# Altium PCB STM32.PcbDoc
Units mm, origin at the board's own origin, x right, y up, seen from the top; angles counter-clockwise.
Board outline 60 x 60 mm, 4 copper layers (Top Layer, Int1 (GND), Int2 (PWR), Bottom Layer), stack 1.24 mm thick; 38 components, 25 nets, 180 pads, 58 vias.
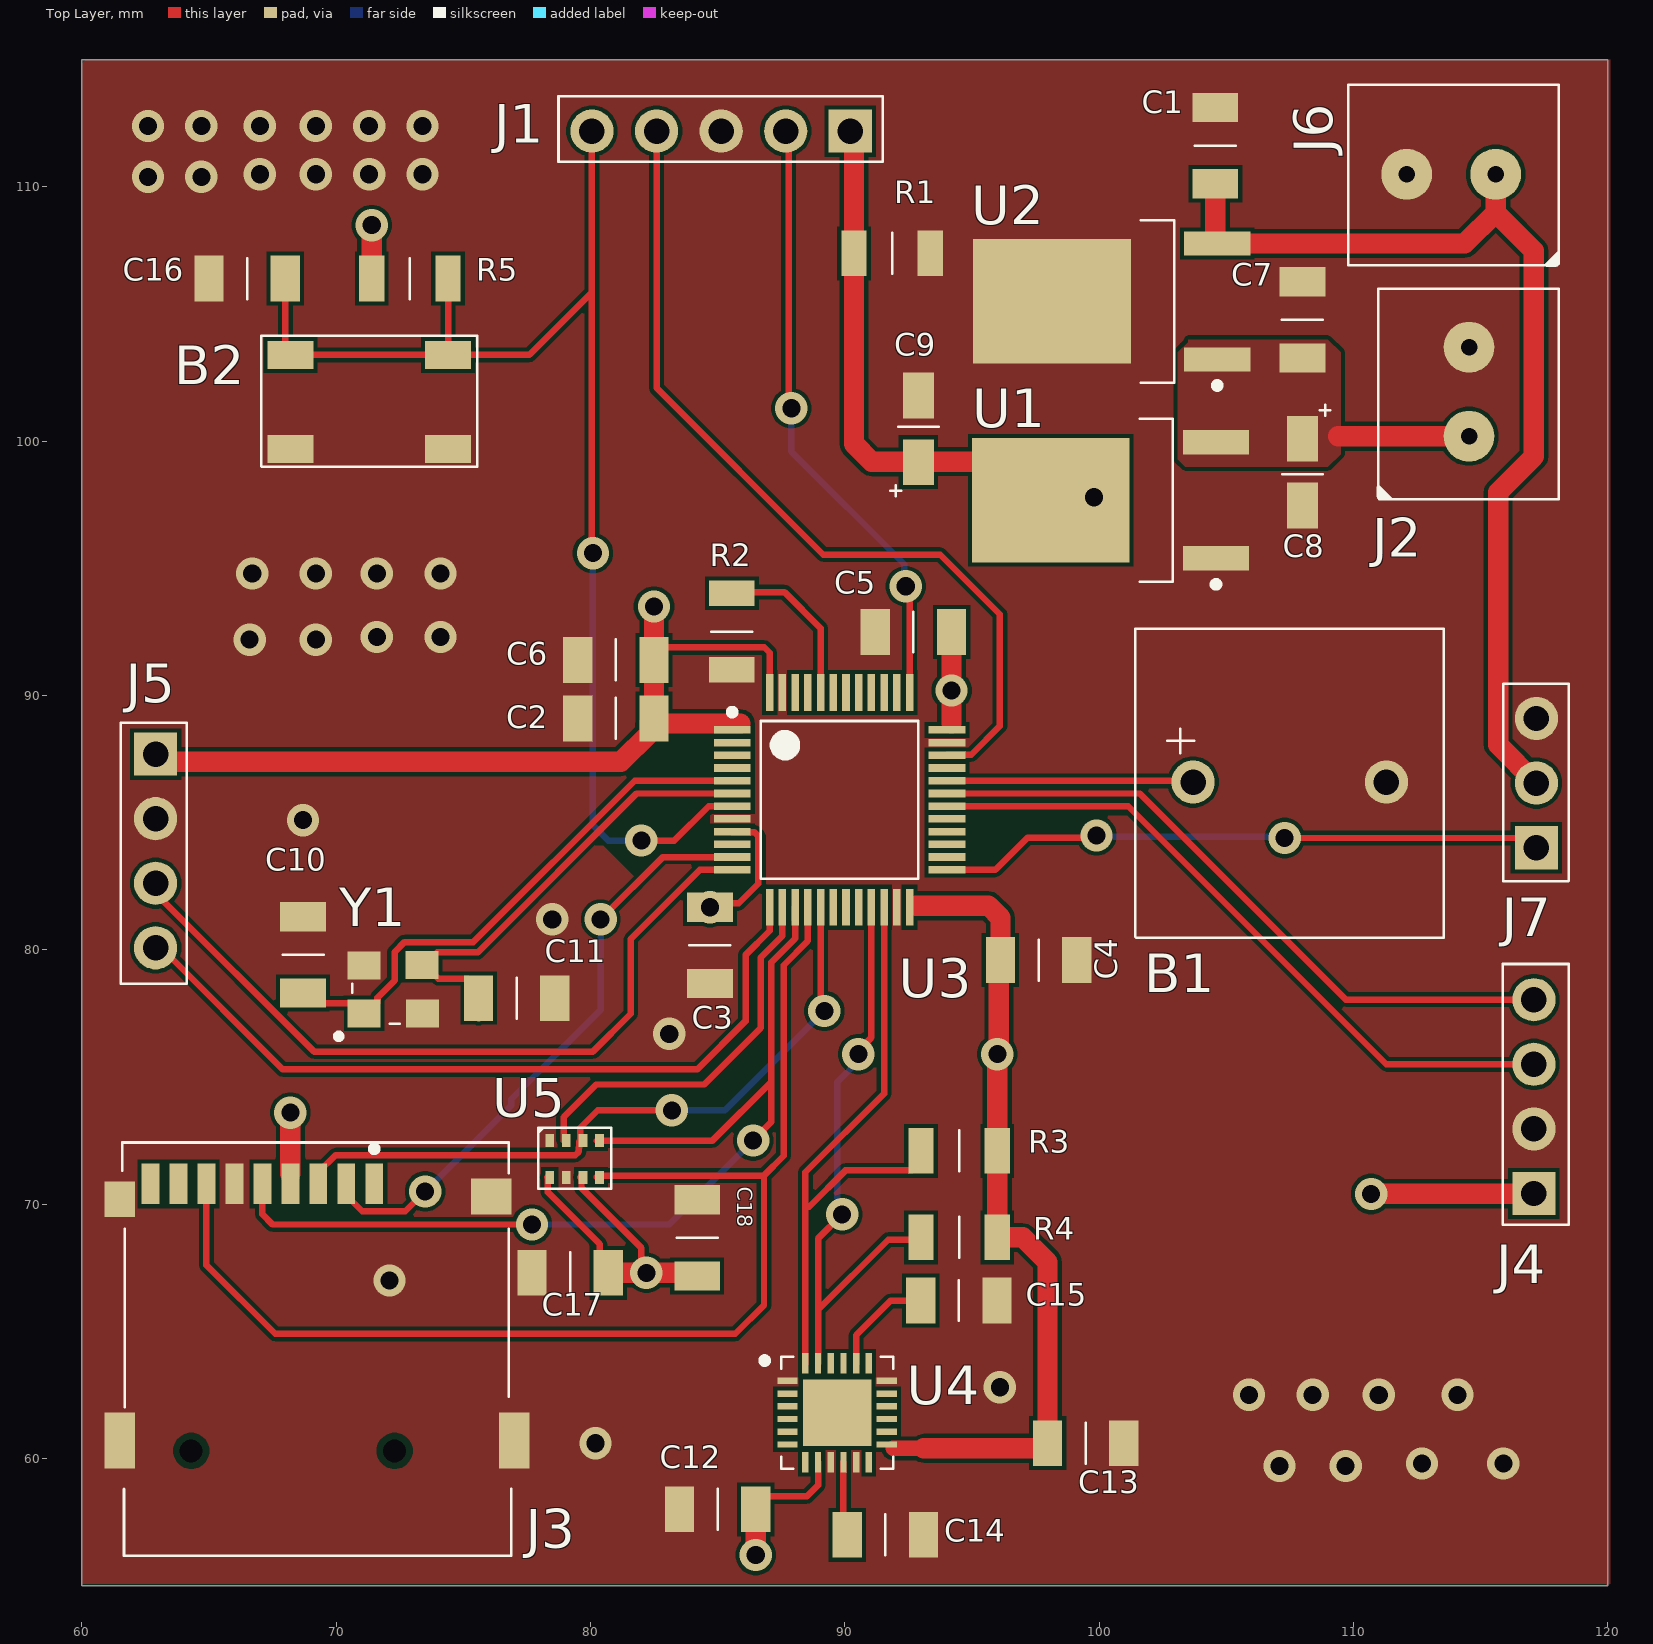
[diagram p0: Top Layer view]
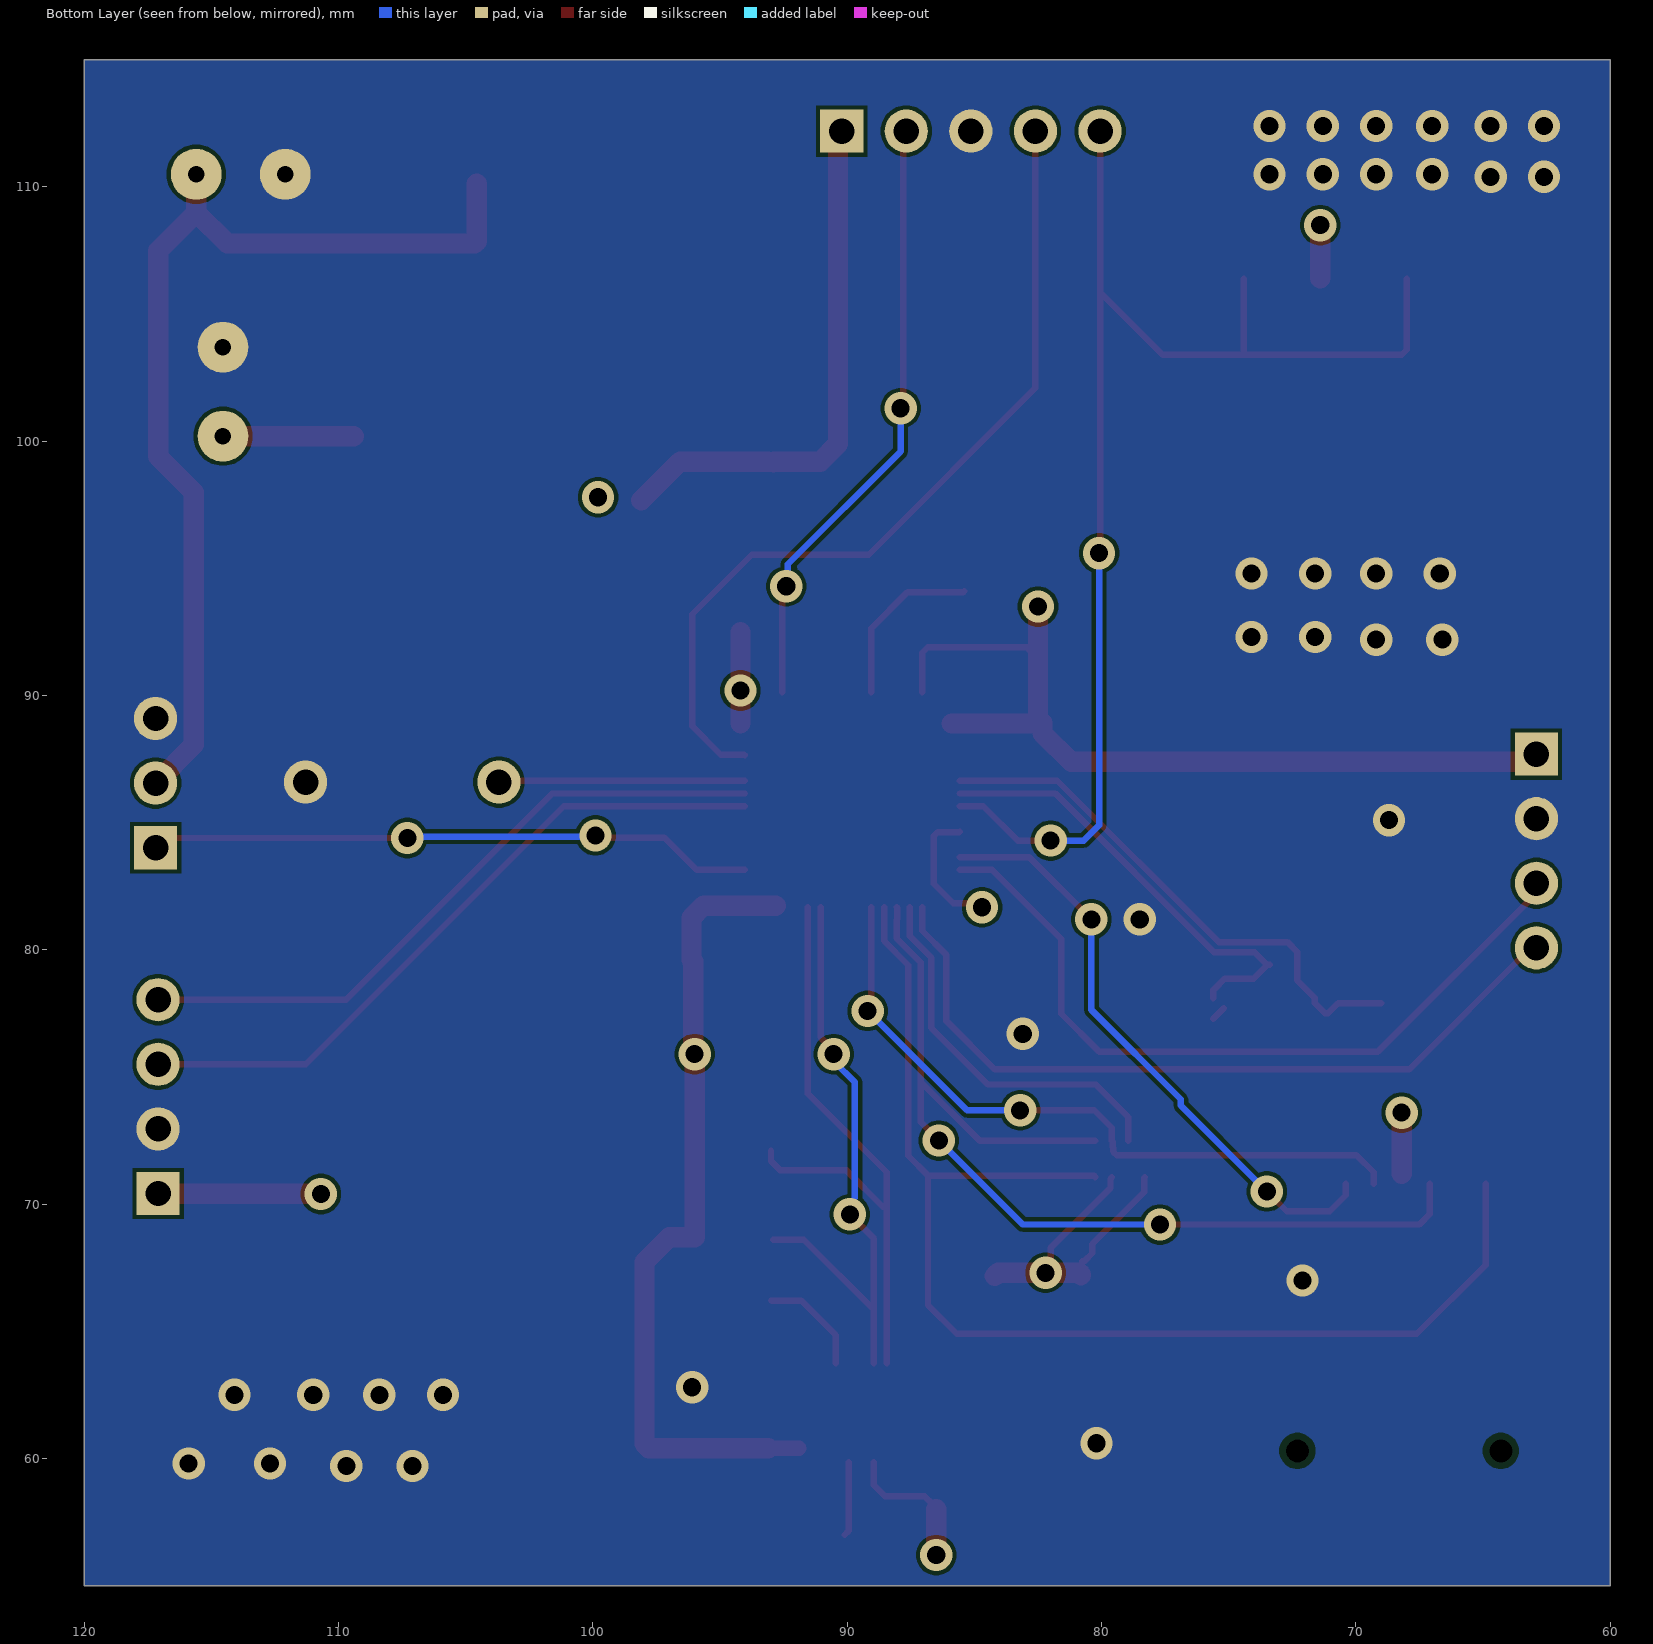
[diagram p1: Bottom Layer view, seen from below]
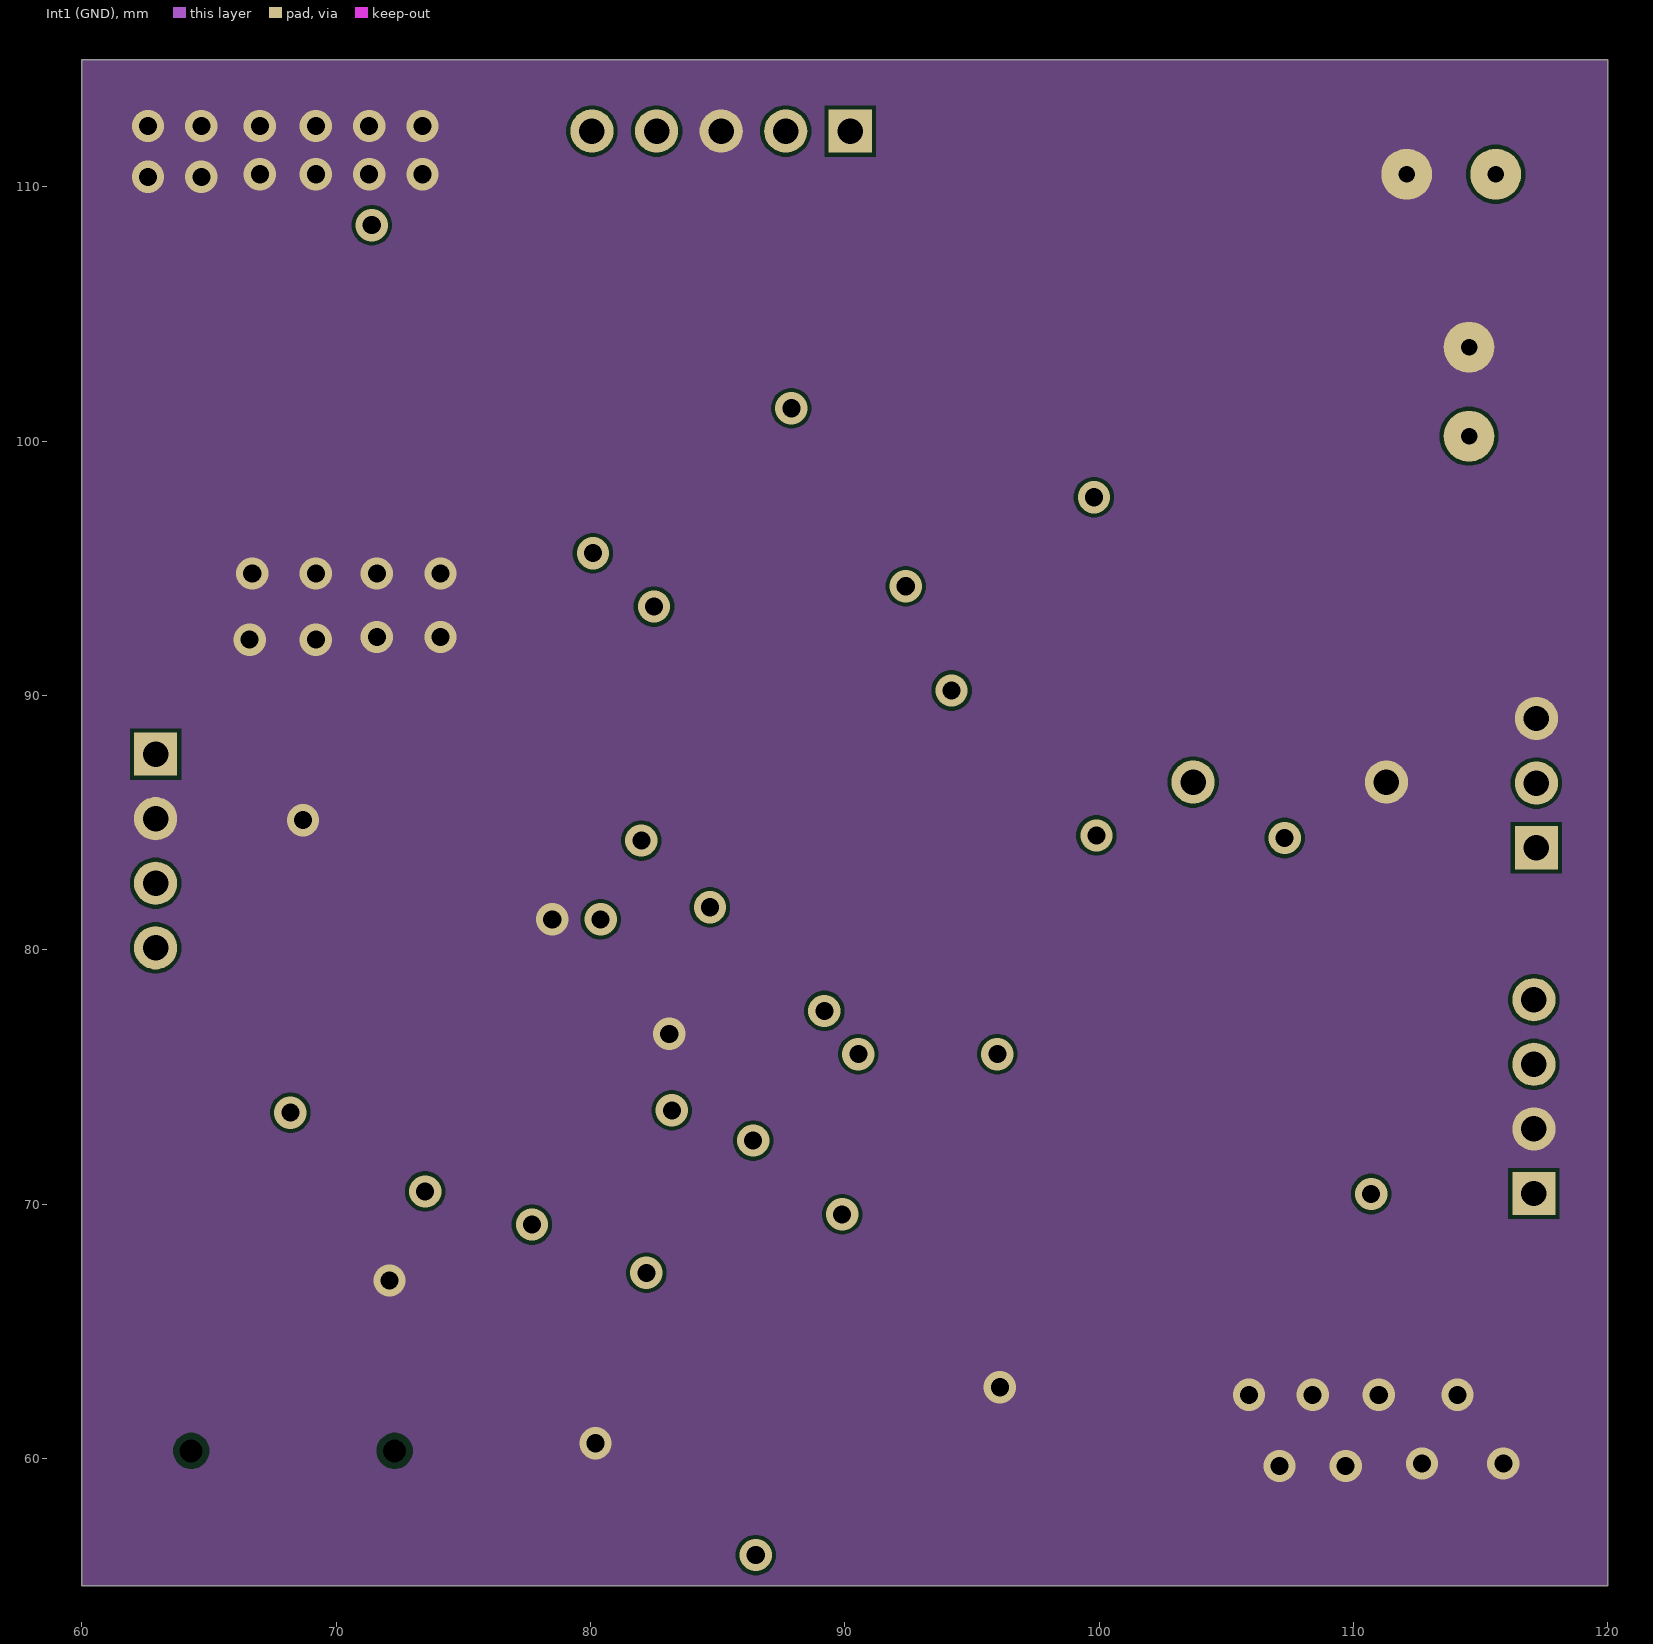
[diagram p2: Int1 (GND)]
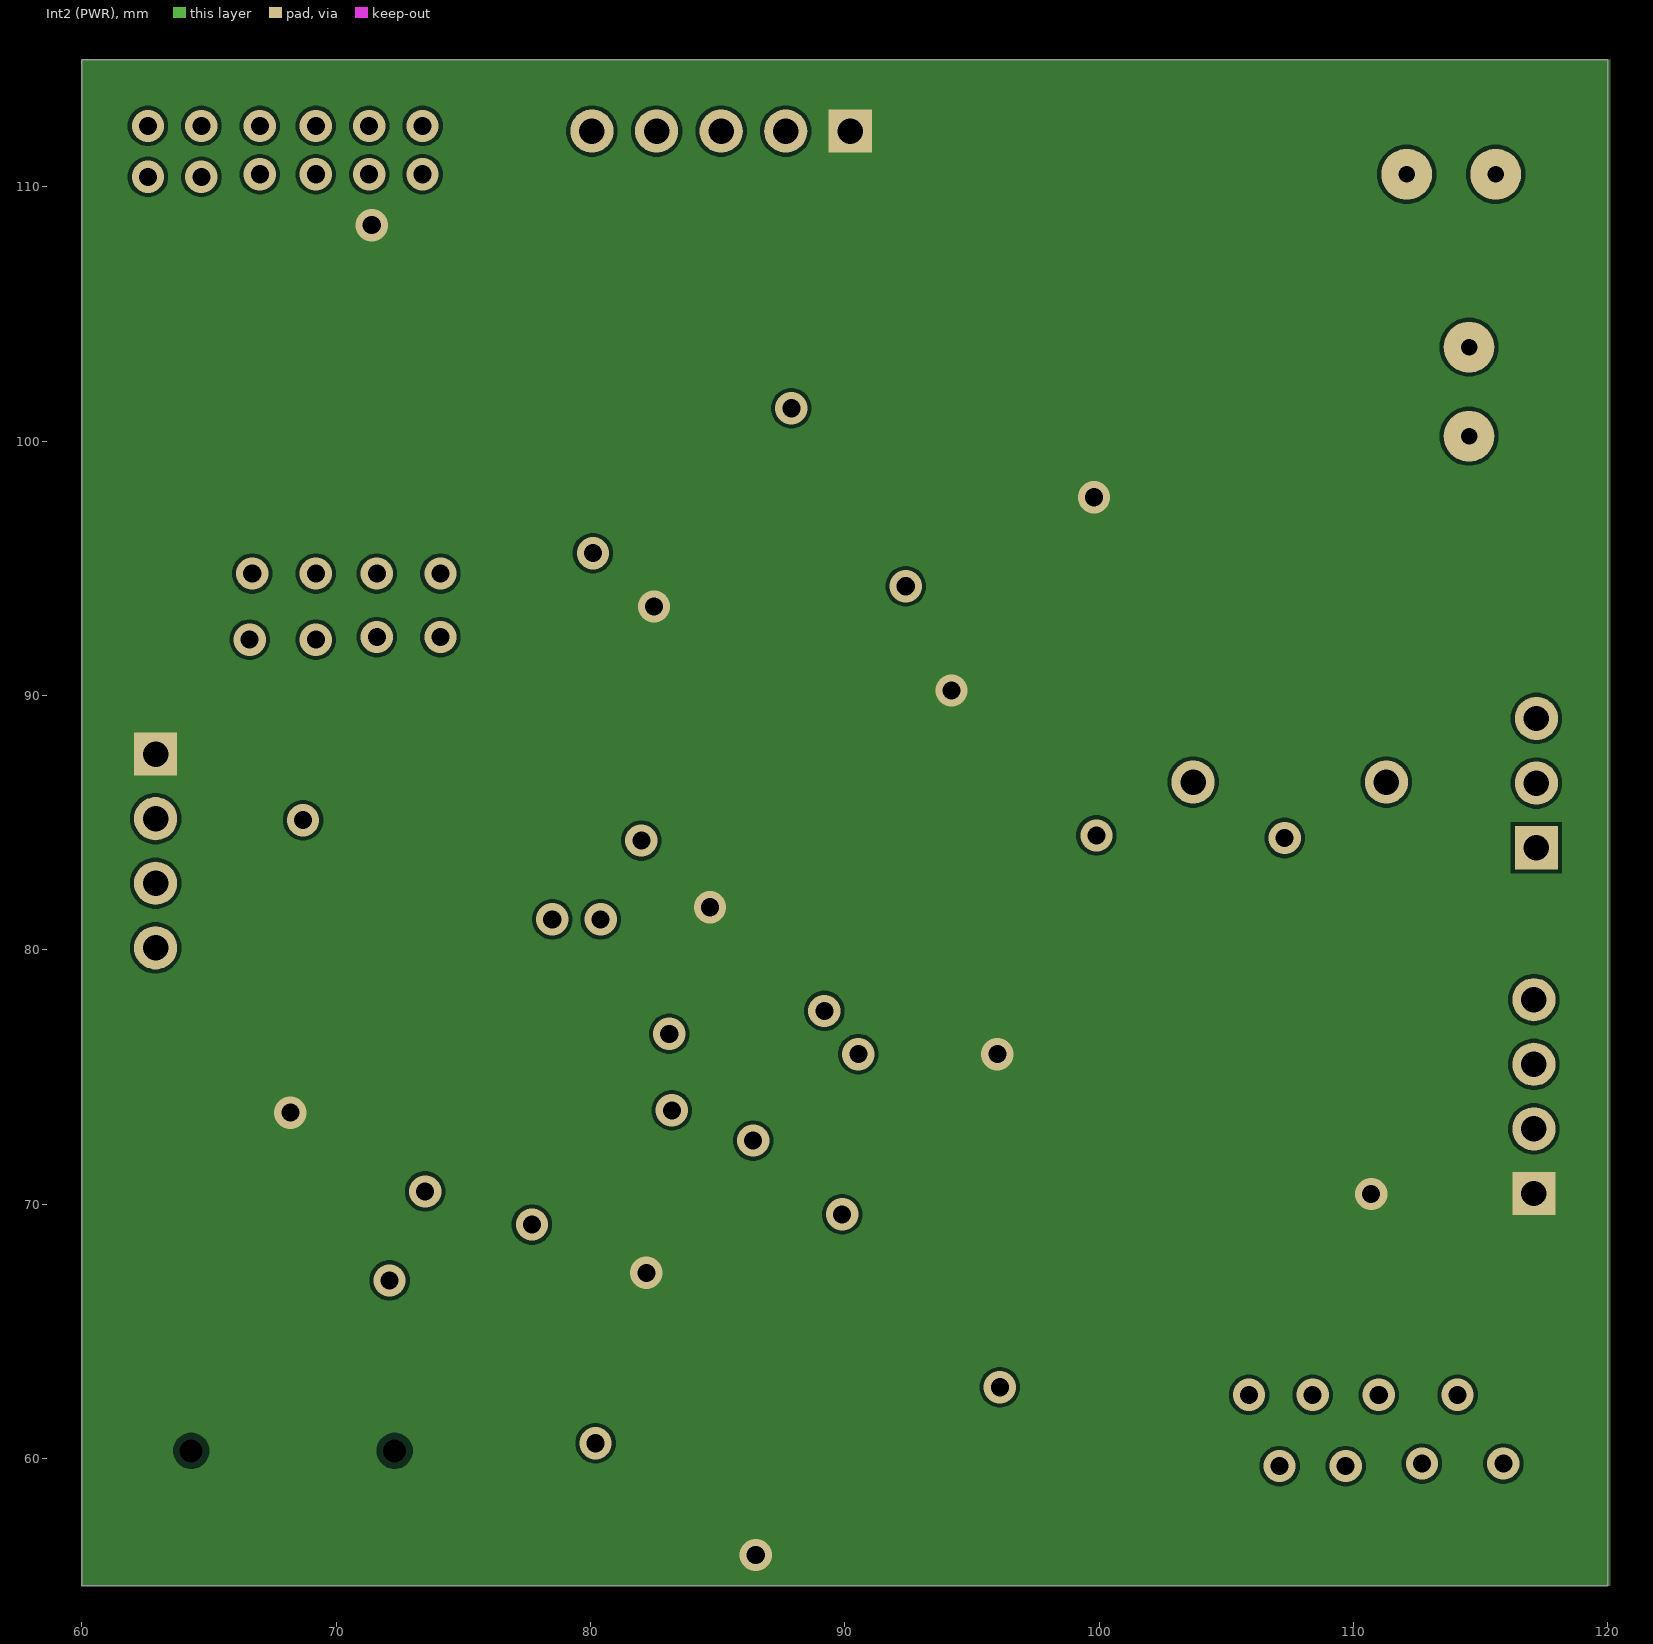
[diagram p3: Int2 (PWR)]
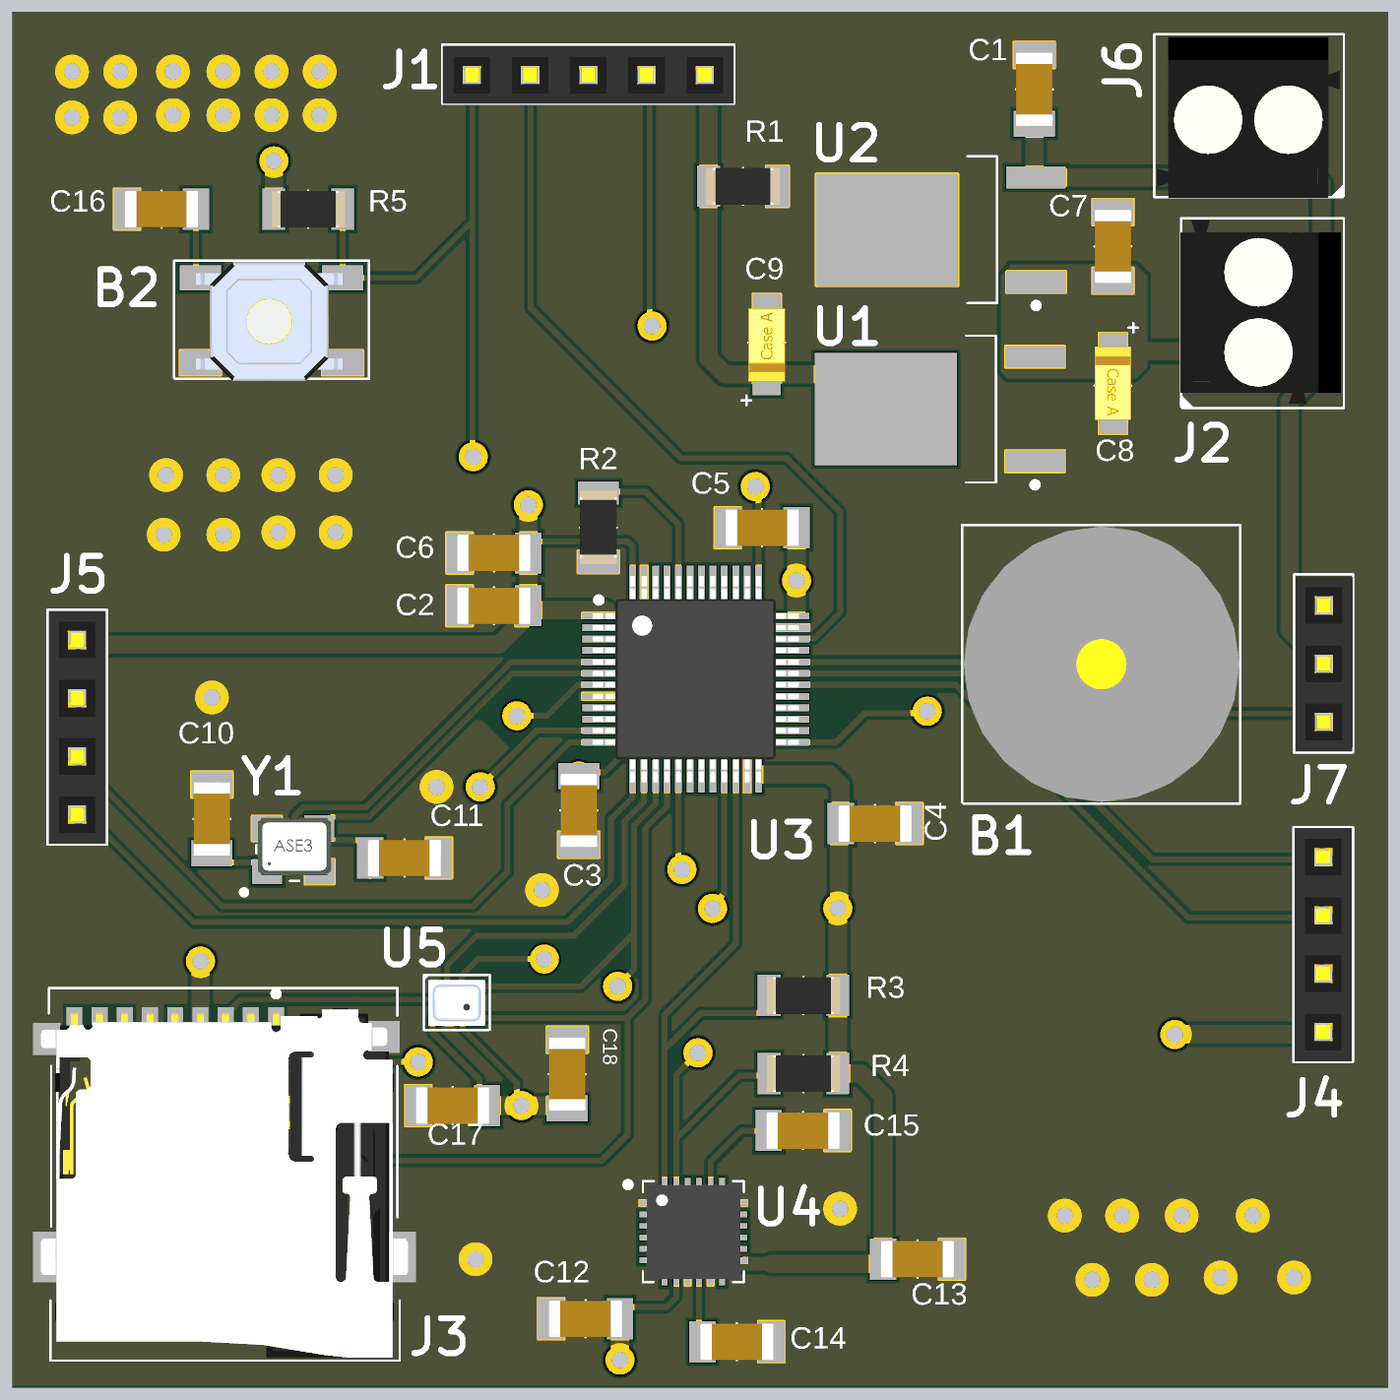
[diagram p4: 3D render of the assembled board from above, using the file's embedded part models]

## Layer stack, top to bottom
Top Solder: solder mask 0.0254, SM-001, Dk 4
Top Layer: signal copper 0.035
Dielectric 1: prepreg 0.2, PP-017, Dk 4.3
Int1 (GND): signal copper 0.035
Dielectric 3: core 0.7, Core-039, Dk 4.8
Int2 (PWR): signal copper 0.035
Dielectric 5: prepreg 0.2, PP-017, Dk 4.3
Bottom Layer: signal copper 0.035
Bottom Solder: solder mask 0.0254, SM-001, Dk 4

## Board outline
60,55 120,55 120,115 60,115

## Design rules (kind name [scope] priority, off if disabled: settings)
Clearance [All] p1: gap=0.254 ignorepadtopadclearanceinfootprint=FALSE except(0.152: Arc-Track Arc-SMDPad Arc-Poly Track-Track Track-SMDPad Track-Poly SMDPad-SMDPad SMDPad-Poly THPad-Poly Via-Poly Fill-Poly Poly-Poly)
MinimumSolderMaskSliver [All] p1: minsoldermaskwidth=0.1
PlaneConnect [InNetClass('All Nets')] p1: planeconnectstyle=Relief reliefexpansion=0.508 reliefentries=4 reliefconductorwidth=0.254 reliefairgap=0.254
PolygonConnect [All] p1: connectstyle=Direct reliefconductorwidth=0.254 reliefentries=4 polygonreliefangle="90 Angle" airgapwidth=0.254
RoutingVias [All] p1: holewidth=0.711 width=1.27 viastyle="Through Hole" minholewidth=0.711 minwidth=1.27 maxholewidth=0.711 maxwidth=1.27
SilkToSolderMaskClearance [IsPad] p1: minsilkscreentomaskgap=0.1 clearancetoexposedcopper=TRUE
SolderMaskExpansion [All] p1: expansion=0.102 istentingtop=FALSE
Width [All] p1: maxlimit=0.8 minlimit=0.254 preferedwidth=0.254 minimp=50.000000 maximp=50.000000 favimp=50.000000
27 further rules are at their usual default settings.

## Components (designator, comment, footprint, x,y, rotation, side; value= is the part's Value field where it differs from the comment)
B1 "Buzzer 5v" "Buzzer 5v" 103.7,86.6 r0 top
B2 "Push Button" "PUSB BUTTON-SMD" 68.2,103.4 r0 top
C1 "0.1 uF C1206" C1206 105.073,112.2 r270 top
C2 "0.1 uF" C1206 80.425,89.6 r0 top
C3 "0.1 uF" C1206 84.2,79.6 r90 top
C4 "0.1 uF" C1206 98.2,79.1 r180 top
C5 "0.1 uF" C1206 92.125,93 r0 top
C6 "0.1 uF" C1206 80.425,91.9 r0 top
C7 "330 nF C1206" C1206 107.5,104.2 r90 top
C8 "10 uF - Tantal" "C1206- TANTAL" 108,98.7 r270 top
C9 "10 uF - Tantal" "C1206- TANTAL" 92.9,100.58 r90 top
C10 "16 pF" C1206 68.2,79.225 r90 top
C11 "16 pF" C1206 76.525,78.6 r0 top
C12 "0.1 uF C1206" C1206 85.575,57.5 r180 top
C13 "0.1 uF C1206" C1206 98.9,61.1 r0 top
C14 "0.1 uF" C1206 92.175,56.5 r180 top
C15 "2.2 nF c1206" C1206 95.063,65.712 r180 top
C16 "0.1 uF C1206" C1206 67.075,105.9 r180 top
C17 "0.1 uF C1206" C1206 79.775,66.8 r180 top
C18 "0.1 uF C1206" C1206 83.7,68.1 r90 top
J1 "Header 2.54 1x5" "Header 2.54 1x5" 90.22,112.2 r180 top
J2 "Klemens 1x2 3.5mm" "Klemens 1x2 - 3.5mm" 114.5,101.8 r90 top
J3 "Micro SD Card Holder" "Micro SD Card Holder" 68.816,63.725 r0 top
J4 "Header 2.54 1x4" "Header 2.54 1x4" 116.375,70.92 r90 top
J5 "Header 2.54 1x4" "Header 2.54 1x4" 63.625,87.2 r270 top
J6 "Klemens 1x2 3.5mm" "Klemens 1x2 - 3.5mm" 114,110.45 r180 top
J7 "Header 2.54 1x3" "Header 2.54 1x3" 117.175,84.02 r90 top
R1 "10K R1206" "R1206 Resistor" 91.94,107.393 r180 top
R2 "10K R1206" "R1206 Resistor" 85.557,92.593 r270 top
R3 "4.7K R1206" "R1206 Resistor" 94.425,72.1 r0 top
R4 "4.7K R1206" "R1206 Resistor" 94.425,68.696 r0 top
R5 "10K R1206" "R1206 Resistor" 72.975,106.4 r180 top
U1 "LD108633 3.3 Volt Regulator" DPAK228P972X230-3N 100.45,97.68 r180 top
U2 "L7805 5 Volt Regulator" DPAK228P972X230-3N 100.5,105.5 r180 top
U3 "STM32F101" LQFP48-STM 89.8,85.9 r0 top
U4 "MPU6050" QFN50P400X400X90_HS-25N 89.7,61.8 r0 top
U5 "BMP280" BMP280 79.375,71.775 r0 top
Y1 "8 MHz 12.5 pf Osc" "8 MHZ Osc." 72.081,77.99 r0 top

## Footprints (in the part's own frame and the unit in brackets; to place one, negate y for a bottom-side part, rotate by r counter-clockwise, add the part's x,y. Pads: shape width x height; smd on the part's side, far side on the other; paste and mask are expansions set on the pad)
"8 MHZ Osc." [mm]
  rect 1.3x1.1 smd mask+0.05: 1(-0.981,-0.49) 2(1.319,-0.49) 3(1.303,1.417) 4(-0.986,1.401)
  silkscreen extent -2.08,-1.49 0.42,0.67, body extent -1.38,-0.64 1.82,1.86, height 1.22
BMP280 [mm]
  rect 0.35x0.5 smd mask+0.05: 1(-0.975,0.725) 2(-0.325,0.725) 3(0.325,0.725) 4(0.975,0.725) 5(0.975,-0.725) 6(0.325,-0.725) 7(-0.325,-0.725) 8(-0.975,-0.725)
  silkscreen extent -1.45,-1.17 1.45,1.22, body extent -1.24,-1 1.26,1, height 0.95
"Buzzer 5v" [mm]
  round 1.7 hole 1 mask+0.05: 1(0,0) 2(7.6,0)
  silkscreen extent -2.27,-6.12 9.85,6.02, body extent -2.2,-6.05 9.79,5.95, height 9.5
C1206 [mm]
  rect 1.15x1.8 smd mask+0.05: 1(-0.925,-0.5) 2(2.075,-0.5)
  silkscreen extent 0.58,-1.3 0.58,0.31, body extent -1.02,-1.3 2.18,0.3, height 1
"C1206- TANTAL" [mm]
  rect 1.8x1.23 smd mask+0.05: 1(-1.4,0) 1(-1.4,0) 2(1.22,0)
  silkscreen extent -2.74,-0.8 0,1.1, body extent -1.7,-0.8 1.5,0.8, height 1.62
DPAK228P972X230-3N [mm] "D-PAK, 3-Pads, Body 6,40x6,56mm (max), IPC Medium Density"
  rect 2.6x0.95 smd mask+0.05: 1(-4.15,2.28) 2(-4.15,-2.28)
  rect 6.2x4.9 smd mask+0.05: 3(2.35,0)
  silkscreen extent -4.28,-3.2 -1.15,3.43, body extent -2.5,-3.2 4.1,3.2, height 2.3
"Header 2.54 1x3" [mm]
  rect 1.7x1.7 hole 1 mask+0.05: 1(0,-0.025)
  round 1.7 hole 1 mask+0.05: 2(2.54,-0.025) 3(5.08,-0.025)
  silkscreen extent -1.33,-1.3 6.45,1.28, body extent -1.26,-1.27 6.36,1.23, height 9.1
"Header 2.54 1x4" [mm]
  rect 1.7x1.7 hole 1 mask+0.05: 1(-0.5,-0.725)
  round 1.7 hole 1 mask+0.05: 2(2.04,-0.725) 3(4.58,-0.725) 4(7.12,-0.725)
  silkscreen extent -1.73,-2.1 8.52,0.5, body extent -1.68,-2.05 8.48,0.45, height 9.1
"Header 2.54 1x5" [mm]
  rect 1.7x1.7 hole 1 mask+0.05: 1(0,0)
  round 1.7 hole 1 mask+0.05: 2(2.54,0) 3(5.08,0) 4(7.62,0) 5(10.16,0)
  silkscreen extent -1.28,-1.37 11.48,1.2, body extent -1.25,-1.3 11.45,1.2, height 9.1
"Klemens 1x2 - 3.5mm" [mm]
  round 2 hole 0.65: 1(-1.6,-0.05) 2(1.9,-0.05)
  silkscreen extent -4.11,-3.58 4.2,3.58, body extent -3.9,-3.45 4.09,3.55, height 8.9
LQFP48-STM [mm] "TSQFP, 48-Leads, Body 7,00x7,00mm, Pitch 0,50mm, IPC Medium Density"
  rect 1.45x0.3 smd mask+0.05: 1(-4.225,2.75) 2(-4.225,2.25) 3(-4.225,1.75) 4(-4.225,1.25) 5(-4.225,0.75) 6(-4.225,0.25) 7(-4.225,-0.25) 8(-4.225,-0.75) 9(-4.225,-1.25) 10(-4.225,-1.75) 11(-4.225,-2.25) 12(-4.225,-2.75) 25(4.225,-2.75) 26(4.225,-2.25) 27(4.225,-1.75) 28(4.225,-1.25) 29(4.225,-0.75) 30(4.225,-0.25) 31(4.225,0.25) 32(4.225,0.75) 33(4.225,1.25) 34(4.225,1.75) 35(4.225,2.25) 36(4.225,2.75)
  rect 0.3x1.45 smd mask+0.05: 13(-2.75,-4.225) 14(-2.25,-4.225) 15(-1.75,-4.225) 16(-1.25,-4.225) 17(-0.75,-4.225) 18(-0.25,-4.225) 19(0.25,-4.225) 20(0.75,-4.225) 21(1.25,-4.225) 22(1.75,-4.225) 23(2.25,-4.225) 24(2.75,-4.225) 37(2.75,4.225) 38(2.25,4.225) 39(1.75,4.225) 40(1.25,4.225) 41(0.75,4.225) 42(0.25,4.225) 43(-0.25,4.225) 44(-0.75,4.225) 45(-1.25,4.225) 46(-1.75,4.225) 47(-2.25,4.225) 48(-2.75,4.225)
  silkscreen extent -4.35,-3.1 3.1,3.57, body extent -4.5,-4.5 4.5,4.5, height 1.6
"Micro SD Card Holder" [mm]
  rect 0.7x1.6 smd paste+0 mask+0: 1(2.684,7.075) 2(1.584,7.075) 3(0.484,7.075) 4(-0.616,7.075) 5(-1.716,7.075) 6(-2.816,7.075) 7(-3.916,7.075) 8(-5.016,7.075) Cd(-6.116,7.075)
  rect 1.2x1.4 smd paste+0 mask+0: 10(-7.316,6.475)
  rect 1.6x1.4 smd paste+0 mask+0: 11(7.284,6.575)
  rect 1.2x2.2 smd paste+0 mask+0: 12(-7.316,-3.025) 13(8.184,-3.025)
  round 0 hole 0.9 unplated paste-1000 mask+0: ""(-4.516,-3.425) ""(3.484,-3.425)
  silkscreen extent -7.22,-7.55 8.08,8.7, body extent -7.57,-7.42 8.43,7.83, height 1.85
"PUSB BUTTON-SMD" [mm]
  rect 1.8x1.1 smd mask+0.05: 1(0,0) 2(6.2,0) 3(0,-3.7) 4(6.2,-3.7)
  silkscreen extent -1.15,-4.4 7.35,0.75, body extent -0.2,-4.5 6.2,0.7, height 1.5
QFN50P400X400X90_HS-25N [mm] "QFN, 24-Leads, Body 4,00x4,00mm, Pitch 0,50mm, Thermal Pad 2,70x2,60mm, IPC Medium Density"
  rect 0.8x0.25 smd mask+0.05: 1(-1.95,1.25) 2(-1.95,0.75) 3(-1.95,0.25) 4(-1.95,-0.25) 5(-1.95,-0.75) 6(-1.95,-1.25) 13(1.95,-1.25) 14(1.95,-0.75) 15(1.95,-0.25) 16(1.95,0.25) 17(1.95,0.75) 18(1.95,1.25)
  rect 0.25x0.8 smd mask+0.05: 7(-1.25,-1.95) 8(-0.75,-1.95) 9(-0.25,-1.95) 10(0.25,-1.95) 11(0.75,-1.95) 12(1.25,-1.95) 19(1.25,1.95) 20(0.75,1.95) 21(0.25,1.95) 22(-0.25,1.95) 23(-0.75,1.95) 24(-1.25,1.95)
  rect 2.7x2.6 smd mask+0.05: 25(0,0)
  silkscreen extent -2.97,-2.2 2.2,2.2, body extent -2.07,-2.07 2.07,2.07, height 0.9
"R1206 Resistor" [mm]
  rect 1x1.8 smd mask+0.05: 1(-1.425,0) 2(1.575,0)
  silkscreen extent 0.08,-0.8 0.08,0.81, body extent -1.52,-0.8 1.68,0.81, height 0.55

## Part data
B2: "Smd Push Button", Satın Alma Linki=https://urun.n11.com/diger/mini-pushbutton-switch-smd-P227461537?gclid=Cj0KCQjwkoDmBRCcARIsAG3xzl8Y_-jeD7HocNM6lvuZ_rVp83568XPGtNzlPwXWLph8oCRqo0yh87UaApZYEALw_wcB&gclsrc=aw.ds
C2 C3 C4 C5 C6 C14: library part "0.1 uF C1206", "0.1 uF C1206"
U1: library part "LD108633 DPAK", "LD1086 3.3V REGULATOR"
U2: library part L7805-DPAK, "L7805 5V REGULATOR. SMD PAKET"
U3: "STM32F101 48 PİNLİ MİKROİŞLEMCİ"
U4: "MPU6050 GYRO"
U5: "BMP280 SENSOR"

## Via types
v1: diameter 1.27, hole 0.711, Top Layer to Bottom Layer, 58 vias

## Nets (pads, with @x,y where several pads share a name; then routed paths per layer and width w, separated by ;. In a path a pad name is that pad's centre, name@x,y a point inside that pad or via, vN(x,y) a via of type N, cw(c..) or ccw(c..) an arc to the next point about the centre after c; other vN are vias at no path point)
3.3V: C2.2 C3.2 C4.2 C5.2 C6.2 C9.1 C12.1 C13.1 C17.1 C18.1 J1.1 J3.4 J4.1 J5.1 R1.2 R3.2 R4.2 R5.2 U1.3 U3.1 U3.9 U3.24 U3.36 U3.48 U4.8 U4.13 U5.6 U5.8 | length 125.5
  Top Layer w0.254: U5.8@78.3,71.05 78.324,71.026 78.324,70.476 80.368,68.432 80.368,68.073 80.691,67.75 C17.1@80.759,67.75 ; U5.6@79.6,71.05 79.648,71.002 79.648,70.635 82.006,68.277 82.006,67.494 v1(82.2,67.3) ; C17.1 C17.1@80.8,67.2 ; C6.2@82.5,91.452 82.948,91.9 86.837,91.9 87.05,91.687 U3.48 ; v1(84.7,81.675) 84.857,81.832 85.832,81.832 86.6,82.6 86.6,84.478 86.451,84.627 85.598,84.627 U3.9 ; C12.1@86.651,58.21 86.948,58.507 88.507,58.507 88.95,58.95 U4.8
  Top Layer w0.6: 91.9,60.4 93.1,60.4
  Top Layer w0.8: J5.1 63.2,87.4 81.2,87.4 82.325,88.525 82.325,88.925 C2.2 ; J3.4@68.2,71.2 v1(68.2,73.6) ; R5.2 v1(71.4,108.5) ; C17.1@80.809,67.2 80.809,67.234 80.875,67.3 v1(82.2,67.3) 84.075,67.3 C18.1 ; v1(82.5,93.5) 82.5,91.452 C6.2 C2.2 ; 85.9,88.9 82.675,88.9 82.5,89.075 C2.2 ; v1(86.5,56.2) C12.1 ; J1.1 90.365,112.055 R1.2 90.365,99.893 91.069,99.19 92.89,99.19 C9.1@92.9,99.18 ; 92.8,81.737 95.656,81.737 96.125,81.269 C4.2 ; 93.1,60.4 97.8,60.4 97.975,60.575 C13.1 97.975,67.725 97.004,68.696 R4.2 R3.2 v1(96,75.9) 96.063,75.962 96.063,79.563 C4.2@96.1,79.6 ; C9.1@93.1,99.2 96.58,99.2 U1.3 ; 94.2,88.9 v1(94.2,90.2) C5.2 ; v1(110.7,70.4) 110.71,70.41 117.09,70.41 J4.1
  other v1: 99.8,97.8
5V: C1.2 J6.1 J7.2 U2.2 | length 39.5
  Top Layer w0.8: C1.2 104.573,107.855 104.648,107.78 U2.2 114.38,107.78 115.594,108.994 117.1,107.489 117.1,99.4 115.696,97.996 115.696,88.064 J7.2 ; 115.6,109.1 J6.1
7.4V: C7.1 C8.1 J2.1 U1.2 U2.1 | length 5.3
  Top Layer w0.254: 109.3,100.3 109.4,100.2
  Top Layer w0.8: 109.4,100.2 J2.1
GND: B1.2 B2.3 B2.4 C1.1 C2.1 C3.1 C4.1 C5.1 C6.1 C7.2 C8.2 C9.2 C10.2 C11.2 C12.2 C13.2 C14.1 C15.1 C16.2 C17.2 C18.2 J1.3 J2.2 J3.6 J3.10 J3.11 J3.12 J3.13 J4.2 J5.2 J6.2 J7.3 R1.1 R2.2 U1.1 U2.3 U3.8 U3.23 U3.35 U3.47 U4.1 U4.9 U4.11 U4.18 U5.1 U5.7 Y1.2 Y1.4
  other v1: 107.1,59.7 109.7,59.7 112.7,59.8 115.9,59.8 80.2,60.6 105.9,62.5 108.4,62.5 111,62.5 114.1,62.5 96.1,62.8 72.1,67 83.1,76.7 78.5,81.2 68.7,85.1 66.6,92.2 69.2,92.2 71.6,92.3 74.1,92.3 66.7,94.8 69.2,94.8 71.6,94.8 74.1,94.8 62.6,110.4 64.7,110.4 67,110.5 69.2,110.5 71.3,110.5 73.4,110.5 62.6,112.4 64.7,112.4 67,112.4 69.2,112.4 71.3,112.4 73.4,112.4
NetB1_1: B1.1 U3.32 | length 9.9
  Top Layer w0.254: U3.32 103.25,86.65 B1.1@103.7,87.1
NetC10_1: C10.1 U3.5 Y1.1 | length 21.3
  Top Layer w0.254: C10.1@69,77.9 70.7,77.9 Y1.1 71.2,77.5 71.623,77.923 71.623,78.123 72.3,78.8 72.3,79.917 72.689,80.306 75.395,80.306 81.739,86.65 U3.5
NetC11_1: C11.1 U3.6 Y1.3 | length 18.4
  Top Layer w0.254: Y1.3 Y1.3@73.485,79.407 ; C11.1@75.201,77.699 C11.1@75.6,77.3 ; C11.1 75.6,78.425 75.152,78.873 74.019,78.873 Y1.3@73.485,79.407 ; U3.6 81.813,86.15 75.563,79.9 73.977,79.9 Y1.3@73.485,79.407
NetC14_2: C14.2 U4.10 | length 2.9
  Top Layer w0.254: U4.10 89.95,57.15 C14.2
NetC15_2: C15.2 U4.20 | length 4.2
  Top Layer w0.254: U4.20 90.452,63.752 90.452,64.852 91.8,66.2 92.976,66.2 C15.2
NetJ1_2: J1.2 U3.37 | length 24.1
  Top Layer w0.254: J1.2 87.79,112.09 87.79,101.41 v1(87.9,101.3) ; v1(92.4,94.3) 92.55,94.15 U3.37
  Bottom Layer w0.254: v1(87.9,101.3) 87.9,99.6 92.336,95.164 92.336,94.364 v1(92.4,94.3)
NetJ1_4: J1.4 U3.34 | length 34.2
  Top Layer w0.254: J1.4 82.6,102.1 89.16,95.54 93.76,95.54 96.1,93.2 96.1,88.8 94.973,87.673 94.048,87.673 U3.34
NetJ3_2: J3.2 U3.11 | length 23.9
  Top Layer w0.254: J3.2 70.4,70.35 71.029,69.721 72.721,69.721 v1(73.5,70.5) ; v1(80.4,81.2) 82.85,83.65 U3.11
  Bottom Layer w0.254: v1(73.5,70.5) 76.884,73.884 76.884,74.121 80.4,77.637 v1(80.4,81.2)
NetJ3_3: J3.3 U3.17 U5.3 | length 27.6
  Top Layer w0.254: J3.3 69.3,71.25 69.975,71.925 79.399,71.925 79.548,72.074 79.548,72.228 79.552,72.232 79.552,72.452 U5.3@79.598,72.498 ; U5.3@79.6,72.5 79.6,73 80.29,73.69 v1(83.2,73.69) ; U3.17 89.05,77.75 v1(89.2,77.6)
  Bottom Layer w0.254: v1(83.2,73.69) 85.29,73.69 v1(89.2,77.6)
NetJ3_5: J3.5 U3.15 U5.4 | length 39.7
  Top Layer w0.254: J3.5 67.1,69.6 67.5,69.2 v1(77.7,69.2) ; U5.4@80.25,72.5 84.8,72.5 87.106,74.806 ; v1(86.4,72.5) 86.4,72.525 87.106,73.231 87.106,74.806 ; U3.15 88.027,81.652 88.027,81.2 88.05,81.177 88.05,80.45 87.106,79.506 87.106,74.806
  Bottom Layer w0.254: v1(77.7,69.2) 83.1,69.2 v1(86.4,72.5)
NetJ3_7: J3.7 U3.16 U5.5 | length 49.7
  Top Layer w0.254: J3.7 64.9,67.6 67.6,64.9 85.7,64.9 86.825,66.025 86.825,71.125 ; U5.5@80.25,71.05 80.25,71.077 80.298,71.125 86.825,71.125 ; U3.16 88.55,80.35 87.6,79.4 87.6,71.9 86.825,71.125
NetJ4_3: J4.3 U3.30 | length 27.3
  Top Layer w0.254: U3.30 101.15,85.65 111.3,75.5 J4.3
NetJ4_4: J4.4 U3.31 | length 26.4
  Top Layer w0.254: U3.31 101.599,86.15 109.709,78.04 J4.4
NetJ5_3: J5.3 U3.12 | length 30.3
  Top Layer w0.254: J5.3 62.9,82.23 69.13,76 80.1,76 81.584,77.484 81.584,80.429 84.305,83.15 U3.12
NetJ5_4: J5.4 U3.13 | length 30.8
  Top Layer w0.254: J5.4 63.12,80.08 67.9,75.3 84.2,75.3 86.1,77.2 86.1,79.8 87.05,80.75 U3.13
NetJ7_1: J7.1 U3.25 | length 23.9
  Top Layer w0.254: U3.25 95.927,83.15 97.193,84.416 99.816,84.416 v1(99.9,84.5) ; v1(107.3,84.4) 116.82,84.4 J7.1
  Bottom Layer w0.254: v1(99.9,84.5) 99.95,84.45 107.25,84.45 v1(107.3,84.4)
NetR2_1: R2.1 U3.44 | length 6.8
  Top Layer w0.254: R2.1@85.4,94.1 85.429,94.071 87.629,94.071 89.05,92.65 U3.44
NetR3_1: R3.1 U3.22 U4.24 | length 24.9
  Top Layer w0.254: U4.24 88.45,69.8 ; U3.22 91.55,74.35 88.45,71.25 88.45,69.8 ; R3.1 93,71.7 92.627,71.327 90.027,71.327 88.6,69.9 88.55,69.9 88.45,69.8
NetR4_1: R4.1 U3.21 U4.23 | length 23.3
  Top Layer w0.254: U4.23 88.95,65.85 ; v1(89.9,69.6) 88.95,68.65 88.95,65.85 ; v1(90.534,75.9) 90.534,76.041 91.05,76.557 U3.21 ; R4.1@92.91,68.606 91.706,68.606 88.95,65.85
  Bottom Layer w0.254: 89.7,70.257 89.7,74.791 90.534,75.625 v1(90.534,75.9)
NetU3_14: U3.14 U5.2 | length 15.2
  Top Layer w0.254: U5.2@78.95,72.5 78.95,73.424 80.232,74.706 84.476,74.706 86.7,76.93 86.7,79.7 87.55,80.55 U3.14
NRST: B2.1 B2.2 C16.1 J1.5 R5.1 U3.7 | length 52.6
  Top Layer w0.254: C16.1 68,103.6 B2.1 B2.2 ; R5.1 B2.2 ; J1.5 80.06,105.86 ; v1(80.1,95.6) 80.06,95.64 80.06,105.86 ; v1(82,84.3) 83.3,84.3 84.65,85.65 U3.7 ; B2.2 77.6,103.4 80.06,105.86
  Bottom Layer w0.254: v1(80.1,95.6) 80.1,84.9 80.7,84.3 v1(82,84.3)
pads on no net: J3. J3.1 J3.8 J3.Cd U3.2 U3.3 U3.4 U3.10 U3.18 U3.19 U3.20 U3.26 U3.27 U3.28 U3.29 U3.33 U3.38 U3.39 U3.40 U3.41 U3.42 U3.43 U3.45 U3.46 U4.2 U4.3 U4.4 U4.5 U4.6 U4.7 U4.12 U4.14 U4.15 U4.16 U4.17 U4.19 U4.21 U4.22 U4.25

## Polygon pours and split planes (outlines as drawn)
GND on Top Layer "GND_L01_P003" (solid, remove dead copper, pour order 3): 59.998,115 120.1,115 120.1,54.9 119.926,55.074 60,55.074 60,114.998
7.4V on Top Layer "7.4V_L01_P000" (solid, remove dead copper, pour order 0): 103.1,103.5 103.5,103.9 103.5,104 109,104 109.5,103.5 109.5,99.5 109,99 103.4,99 103.1,99.3 103.1,99.5
3.3V on Int2 (PWR) "3.3V_L03_P001" (solid, remove dead copper, pour order 1): 59.996,114.996 60,115 120.1,115 120.1,55 60,55 60,115
GND on Int1 (GND) "GND_L02_P002" (solid, pour order 2): 60,115 120,115 120,55 60,55
GND on Bottom Layer "GND_L04_P004" (solid, pour order 4): 60,115 120,115 120,55 60,55

## Other copper
Top Layer:
  pour cut-out: 84.698,85.296 84.698,83.934 83.484,83.934 83.445,84.061 84.084,84.7 84.102,84.7
  pour cut-out: 81.7,82.9 80.5,84.1 80.2,84.1 80.2,84.135 81.931,85.866 84.284,85.866 84.284,85.791 84.336,85.739 83.182,84.584 82.739,84.584 82.104,83.95 82.104,83.512 82.207,83.409